# Altium PCB DT_AZP1524B1_PCB1_00A.PcbDoc (part 1 of 3)
Units mm, origin at the board's own origin, x right, y up, seen from the top; angles counter-clockwise.
Board outline 60 x 60.2 mm, 2 copper layers (Top Layer, Bottom Layer), stack 1.57 mm thick; 56 components, 46 nets, 205 pads, 364 vias.
Unrouted connection lines stored in the file: 9.
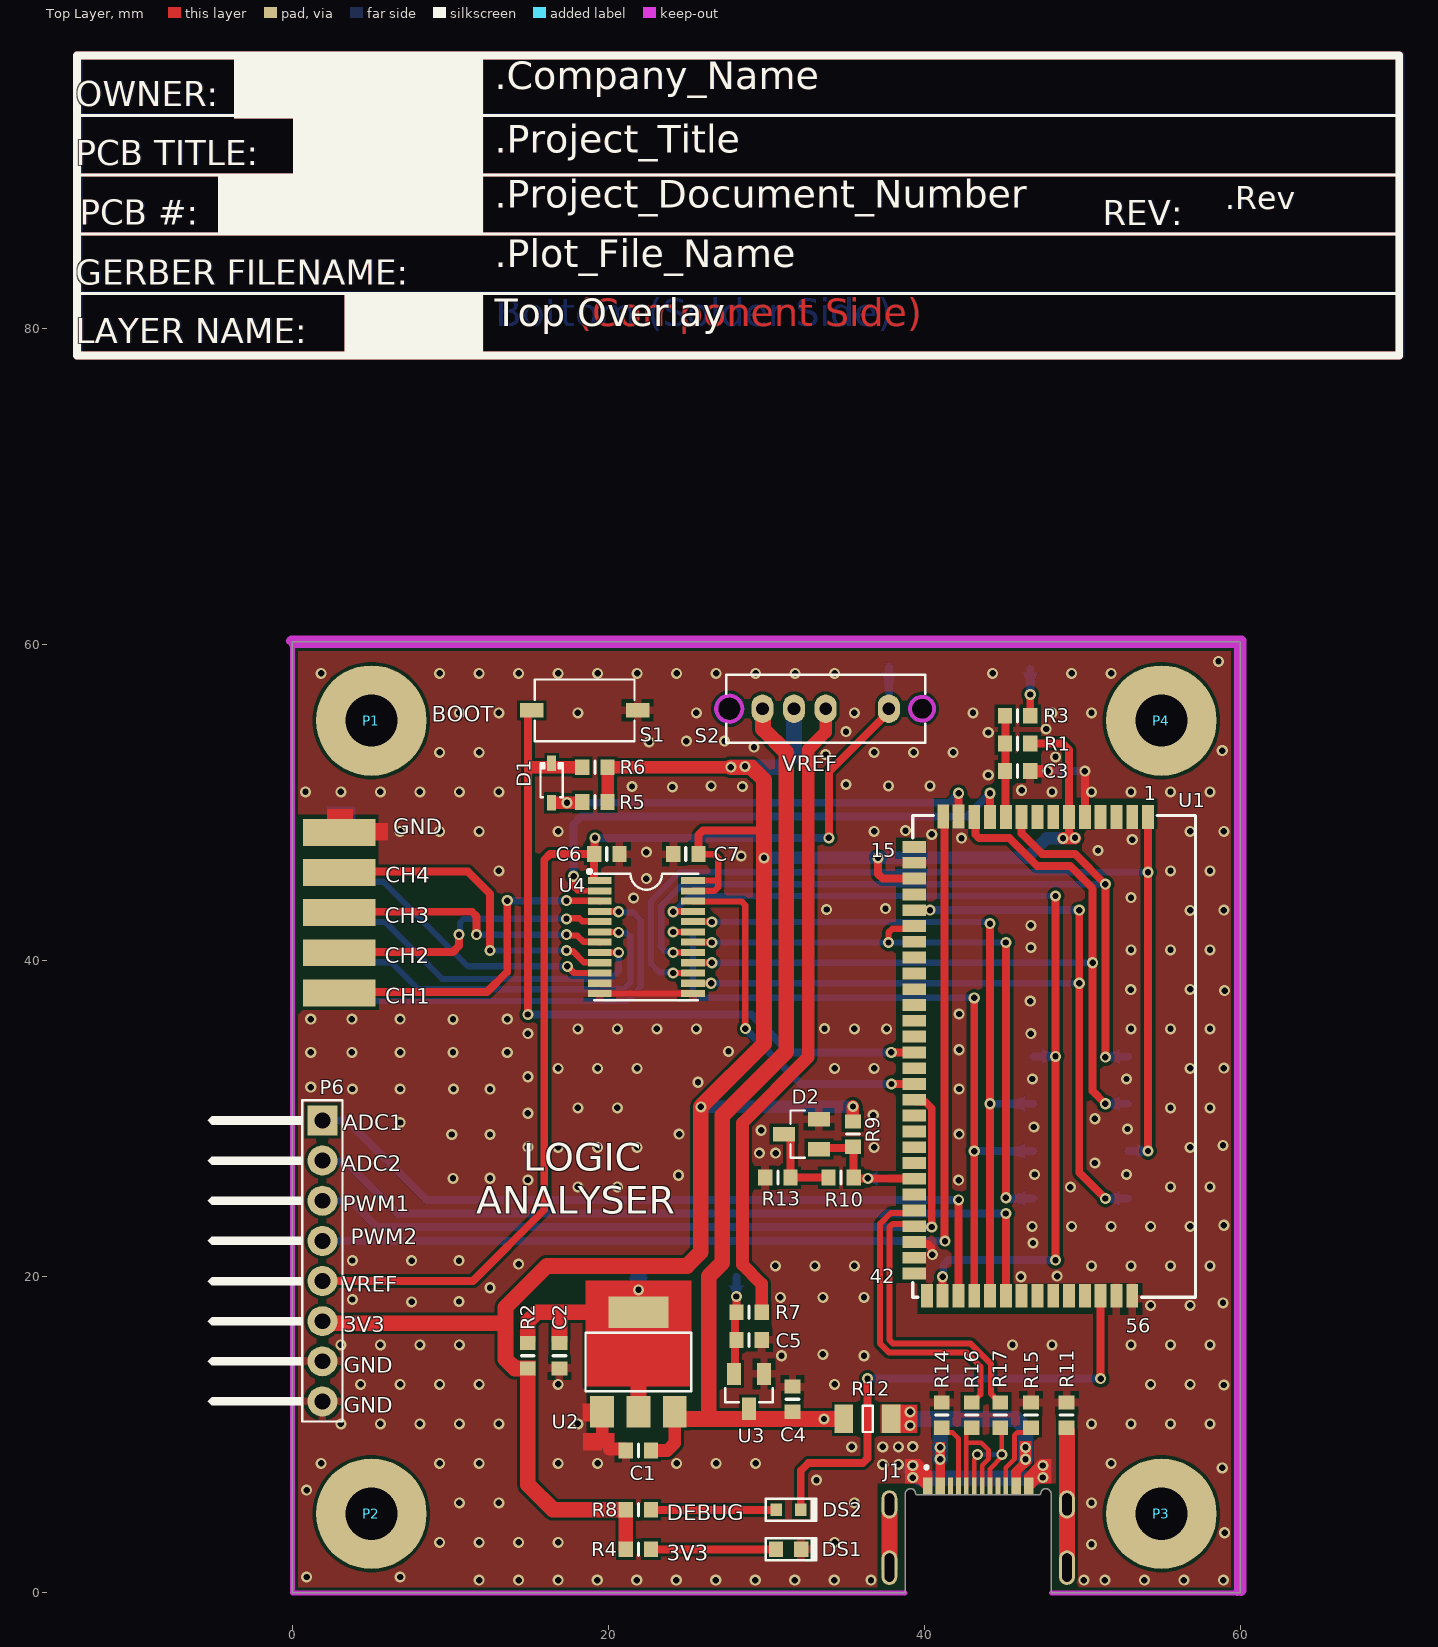
[diagram p0: Top Layer view]
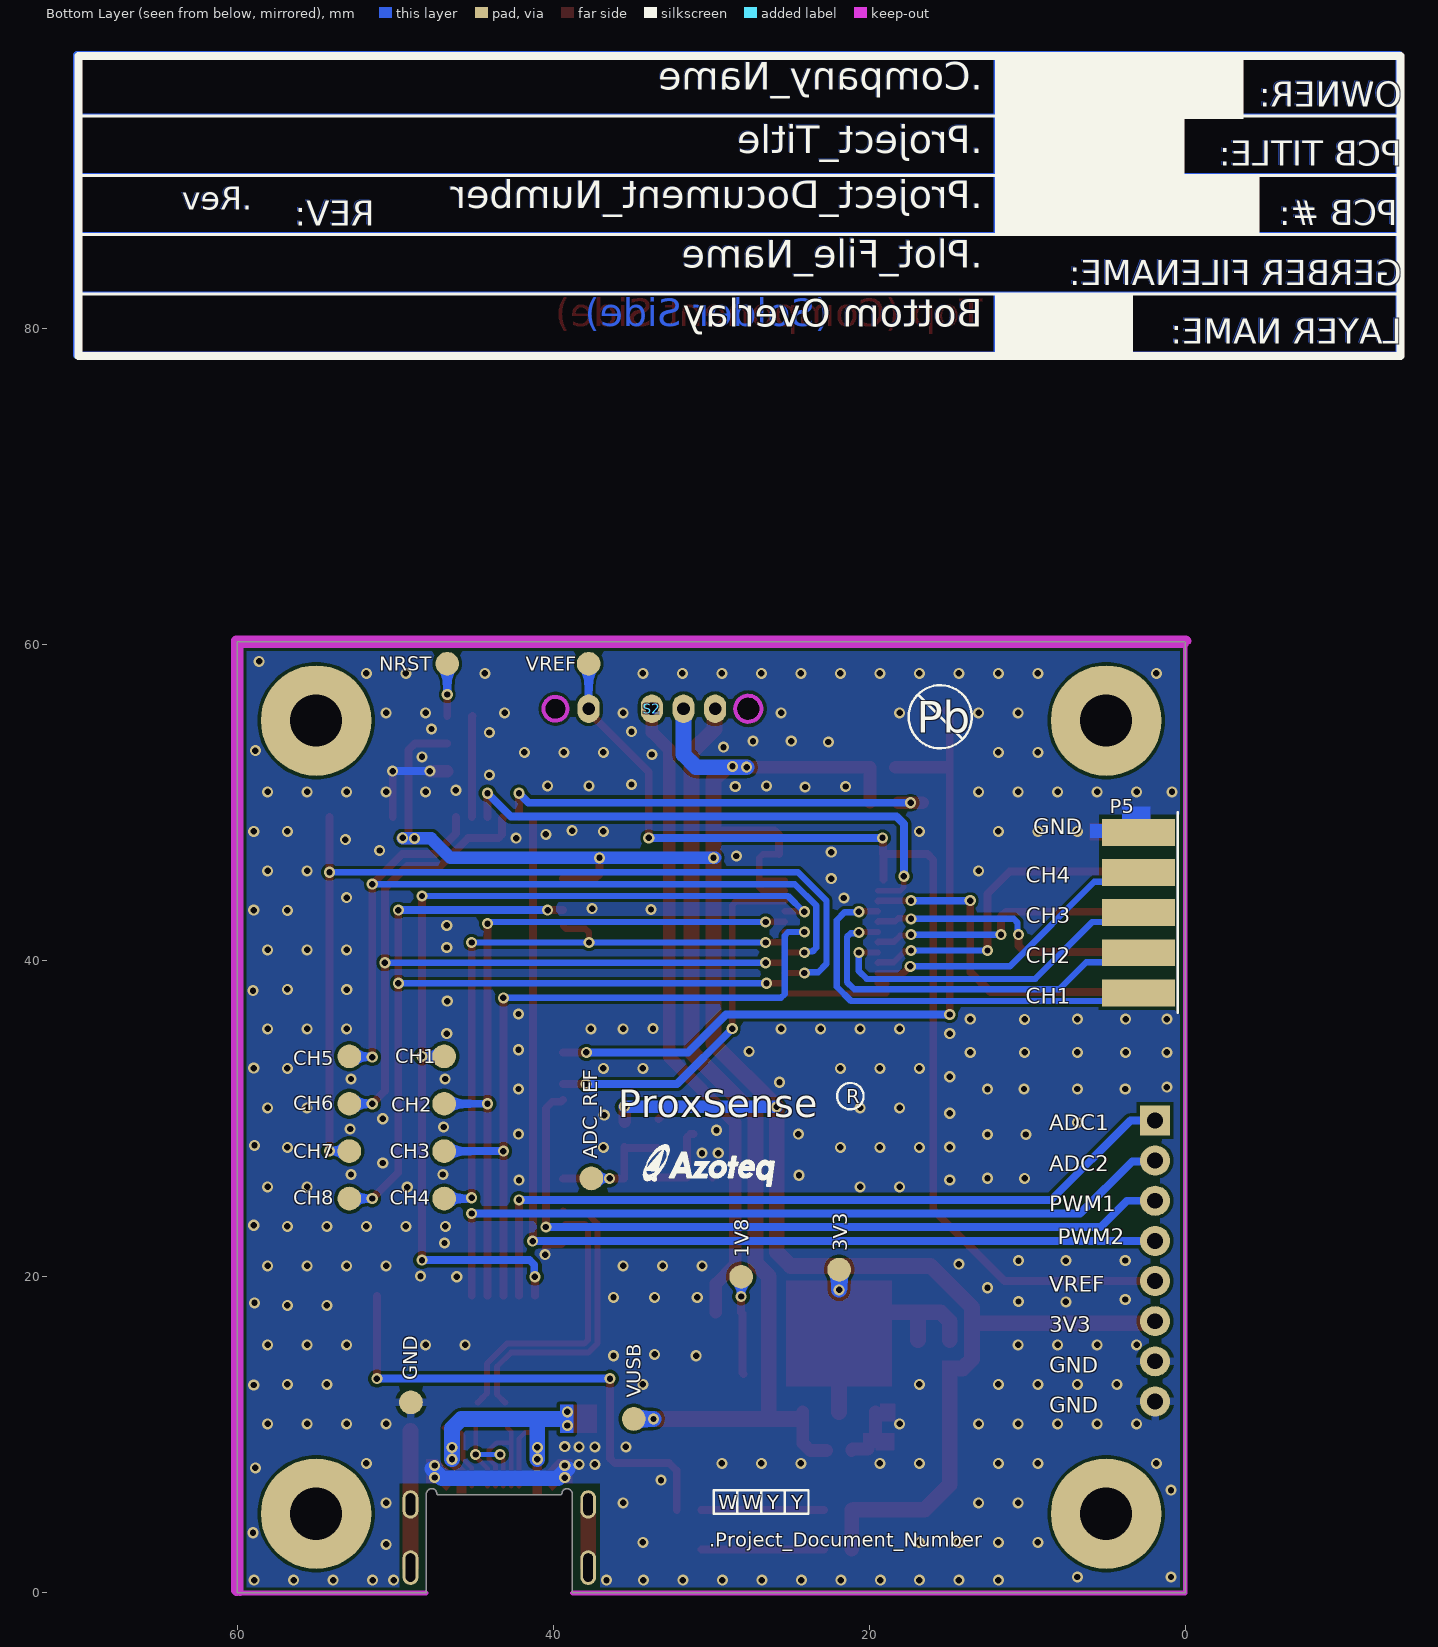
[diagram p1: Bottom Layer view, seen from below]
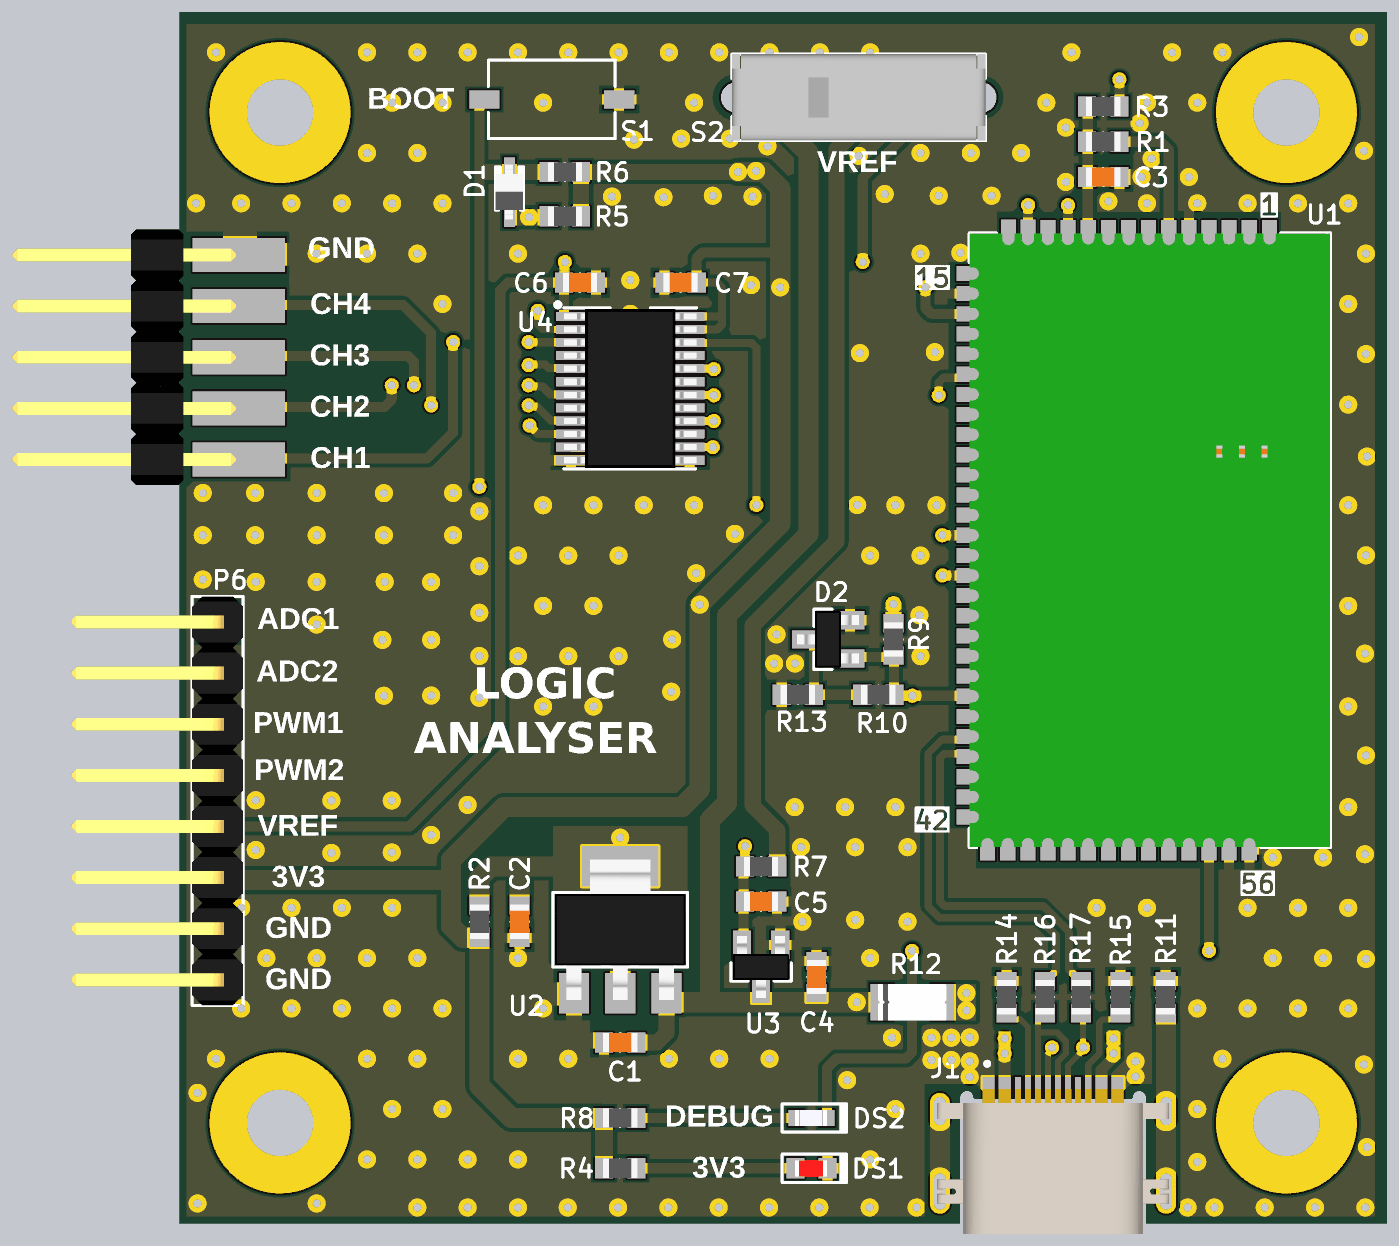
[diagram p3: 3D render of the assembled board from above, using the file's embedded part models]

## Layer stack, top to bottom
Top Solder: solder mask 0.02, Solder Resist, Dk 3.5
Top Layer: signal copper 0.035
Dielectric1: core 1.5, FR-4, Dk 4.8
Bottom Layer: signal copper 0.035
Bottom Solder: solder mask 0.02, Solder Resist, Dk 3.5

## Board outline
0,0 0,60.2 60,60.2 60,0 48.024,0 48.024,6.191 48.024,6.19 ccw(c47.661,6.229) 47.7,6.591 47.698,6.591 ccw(c47.677,6.289) 47.374,6.31 47.374,6.312 cw(c47.239,6.326) 47.225,6.191 47.224,6.191 39.584,6.191 39.583,6.191 cw(c39.569,6.326) 39.434,6.312 39.434,6.31 ccw(c39.131,6.289) 39.11,6.591 39.108,6.591 ccw(c39.147,6.229) 38.784,6.19 38.784,6.191 38.784,0

## Design rules (kind name [scope] priority, off if disabled: settings)
Clearance "V-Score Clearance" [(ObjectKind = 'Track') And (Layer = 'KeepOutLayer') And (Width = AsMM(0.01))] p1: gap=0.5 ignorepadtopadclearanceinfootprint=FALSE except(0: Arc-Hole Track-Hole SMDPad-Hole THPad-Hole Via-Hole Fill-Hole Poly-Hole Region-Hole Text-Hole)
Clearance "Route Clearance" [((ObjectKind = 'Track') or (Objectkind = 'Arc')) And (Layer = 'KeepOutLayer') And (Width = AsMM(0.005))] p2: gap=0.35 ignorepadtopadclearanceinfootprint=FALSE except(0: Arc-Hole Track-Hole SMDPad-Hole THPad-Hole Via-Hole Fill-Hole Poly-Hole Region-Hole Text-Hole)
Clearance "Cu Pour" [Innamedpolygon ('Top-GND') or Innamedpolygon ('Bot-GND')] p3: gap=0.3 ignorepadtopadclearanceinfootprint=FALSE except(0: Arc-Hole Track-Hole SMDPad-Hole THPad-Hole Via-Hole Fill-Hole Poly-Hole Region-Hole Text-Hole)
Clearance "Testpoint Spacing" [hasfootprint('TEST-POINT-1.5MM') vs hasfootprint('TEST-POINT-1.5MM')] p4: gap=0.8 ignorepadtopadclearanceinfootprint=FALSE except(0: Arc-Hole Track-Hole SMDPad-Hole THPad-Hole Via-Hole Fill-Hole Poly-Hole Region-Hole Text-Hole)
Clearance Clearance_General [All] p5: gap=0.2 ignorepadtopadclearanceinfootprint=FALSE except(0: Arc-Hole Track-Hole SMDPad-Hole THPad-Hole Via-Hole Fill-Hole Poly-Hole Region-Hole Text-Hole)
Clearance Via-SMD-Clearance [isvia vs onsoldermask] p6: gap=0.1 ignorepadtopadclearanceinfootprint=FALSE except(0: Arc-Hole Track-Hole SMDPad-Hole THPad-Hole Via-Hole Fill-Hole Poly-Hole Region-Hole Text-Hole)
ComponentClearance [All] p1: gap=0.5 collisioncheckmode=3 verticalgap=0.5 showdistances=FALSE
DiffPairsRouting [All] p1: maxlimit=0.15 minlimit=0.15 mostfreqgap=0.15 toplayer_minwidth=0.381 toplayer_maxwidth=0.381 toplayer_prefwidth=0.381 bottomlayer_minwidth=0.381 bottomlayer_maxwidth=0.381 bottomlayer_prefwidth=0.381 maxuncoupledlength=12.7
FabricationTestPointUsage TestPointUsage [All] p1 off: valid=0 allowmultiple=FALSE
FabricationTestpoint Testpoint [All] p1 off: side=3 testpointundercomponent=TRUE minsize=1.016 maxsize=2.54 preferedsize=1.524 minholesize=0 maxholesize=1.016 preferedholesize=0.813 testpointgrid=0.025 allowsidetop=TRUE allowsidebottom=TRUE usegrid=TRUE gridtolerance=0
FanoutControl Fanout_BGA [IsBGA] p1 off: bgadir=Out bgaviamode=Centered fanoutstyle=Auto fanoutdirection=Alternating viagrid=0.025 // Fanout_BGA (Default Rule)
FanoutControl Fanout_LCC [IsLCC] p2 off: bgadir=Out bgaviamode=Centered fanoutstyle=Auto fanoutdirection=Alternating viagrid=0.025 // Fanout_LCC (Default Rule)
FanoutControl Fanout_SOIC [IsSOIC] p3 off: bgadir=Out bgaviamode=Centered fanoutstyle=Auto fanoutdirection=Alternating viagrid=0.025 // Fanout_SOIC (Default Rule)
FanoutControl Fanout_Small [(CompPinCount < 5)] p4 off: bgadir=Out bgaviamode=Centered fanoutstyle=Auto fanoutdirection=OutThenIn viagrid=0.025 // Fanout_Small (Default Rule)
FanoutControl Fanout_Default [All] p5 off: bgadir=Out bgaviamode=Centered fanoutstyle=Auto fanoutdirection=Alternating viagrid=0.025 // Fanout_Default (Default Rule)
HoleSize [All] p1 off: absolutevalues=TRUE maxlimit=4 minlimit=0.3 maxpercent=80.000 minpercent=20.000
HoleToHoleClearance [All] p1: gap=0.3 allowstackedmicrovias=TRUE
LayerPairs [All] p1 off: enforce=TRUE
MinimumSolderMaskSliver [All] p1: minsoldermaskwidth=0.2
PlaneClearance [All] p1 off: clearance=0.3
PlaneConnect PlaneConnect_Pads [Ispad] p1 off: planeconnectstyle=Relief reliefexpansion=0.5 reliefentries=4 reliefconductorwidth=0.35 reliefairgap=0.25
PlaneConnect PlaneConnect_Vias [Isvia] p2 off: planeconnectstyle=Direct reliefexpansion=0.508 reliefentries=4 reliefconductorwidth=0.254 reliefairgap=0.254
PolygonConnect PolygonConnectVia [IsVia] p1: connectstyle=Direct reliefconductorwidth=0.254 reliefentries=4 polygonreliefangle="90 Angle" airgapwidth=0.254
PolygonConnect [All] p2: connectstyle=Relief reliefconductorwidth=0.5 reliefentries=4 polygonreliefangle="90 Angle" airgapwidth=0.254
RoutingCorners [All] p1: cornerstyle=45-Degree minsetback=2.5 maxsetback=2.5
RoutingPriority [All] p1 off: routingpriority=0
RoutingTopology [All] p1 off: topology=Shortest
RoutingVias "Pwr Vias" [Isvia] p1: holewidth=0.4 width=0.8 viastyle="Through Hole" minholewidth=0.2 minwidth=0.5 maxholewidth=2 maxwidth=5
RoutingVias RoutingVias_General [All] p2: holewidth=0.4 width=0.8 viastyle="Through Hole" minholewidth=0.3 minwidth=0.65 maxholewidth=0.5 maxwidth=0.9
SilkToSilkClearance [All] p1: silktosilkclearance=0.15
SilkToSolderMaskClearance SilkscreenOverComponentPads [isdesignator vs onsoldermask] p1: minsilkscreentomaskgap=0.1 clearancetoexposedcopper=TRUE
SolderMaskExpansion "Via Soldermask" [isvia] p1: expansion=-1 istentingtop=FALSE
SolderMaskExpansion [All] p2: expansion=0.1 istentingtop=FALSE
SupplyNets "Schematic Supply Nets_7" [InNet('3V3')] p1: voltage=0.000
SupplyNets "Schematic Supply Nets_6" [InNet('1V8')] p2: voltage=0.000
SupplyNets "Schematic Supply Nets_4" [InNet('V_USB')] p3: voltage=0.000
SupplyNets "Schematic Supply Nets_3" [InNet('Vref')] p4: voltage=0.000
SupplyNets "Schematic Supply Nets_2" [InNet('V_BUS')] p5: voltage=0.000
SupplyNets "Schematic Supply Nets_1" [InNet('GND')] p6: voltage=0.000
SupplyNets "Schematic Supply Nets" [InNet('CASE_GND')] p7: voltage=0.000
ViasUnderSMD [All] p1: allowed=FALSE
Width Width_diff [InDifferentialPair('RS485')] p1: maxlimit=0.2 minlimit=0.2 preferedwidth=0.2 minimp=50.000000 maximp=50.000000 favimp=50.000000
Width Width_Power [InNetClass('POWER')] p2 off: maxlimit=1 minlimit=0.25 preferedwidth=0.5
Width Width_General [All] p3: maxlimit=5 minlimit=0.2 preferedwidth=0.2
10 further rules are at their usual default settings.

## Classes and differential pairs
component class DT_AZP1524A1_SCH1[SHEET1]_00A: PCB1

## Components (designator, comment, footprint, x,y, rotation, side; value= is the part's Value field where it differs from the comment)
1V8 "" TEST-POINT-1.5MM 28.1,20 r90 bottom
3V3 "" TEST-POINT-1.5MM 21.9,20.45 r180 bottom
ADC_REF "" TEST-POINT-1.5MM 37.581,26.225 r90 bottom
C1 "1uF" C-0603 21.9,9 r0 top
C2 "10uF" C-0603 16.9,15 r90 top
C3 "100nF" C-0603 45.9,52 r180 top
C4 "1uF" C-0603 31.65,12.25 r270 top
C5 "10uF" C-0603 28.9,16 r180 top
C6 "1uF" C-0603 19.9,46.75 r0 top
C7 "1uF" C-0603 24.9,46.75 r0 top
CH1 "" TEST-POINT-1.5MM 46.9,33.95 r180 bottom locked
CH2 "" TEST-POINT-1.5MM 46.9,30.95 r180 bottom
CH3 "" TEST-POINT-1.5MM 46.9,27.95 r180 bottom
CH4 "" TEST-POINT-1.5MM 46.9,24.95 r180 bottom locked
CH5 "" TEST-POINT-1.5MM 52.9,33.95 r180 bottom locked
CH6 "" TEST-POINT-1.5MM 52.9,30.95 r180 bottom locked
CH7 "" TEST-POINT-1.5MM 52.9,27.95 r180 bottom
CH8 "" TEST-POINT-1.5MM 52.9,24.95 r180 bottom
D1 "NSR0320MW2T1G" D-SOD-323 16.4,51.25 r270 top
D2 "LM4041DID" SOT-23 32.225,29.025 r180 top
DS1 "KPT-1608ID" D-LED-RED-0603 31.4,2.75 r180 top
DS2 "WEJT61BC-D76" "D-LED-BLUE-0603 - WEJ updated" 31.4,5.25 r180 top
GND "" TEST-POINT-1.5MM 49,12.05 r180 bottom
J1 "USB4500-03-0-A" J-USB-GCT-USB4500-03-0-A 43.15,3.75 r0 top locked
NRST "" TEST-POINT-1.5MM 46.7,58.8 r90 bottom
P1 "ELx7.0y7.0_D3.3" MPAD-X7.0Y7.0_D3.3 5,55.2 r0 top locked
P2 "ELx7.0y7.0_D3.3" MPAD-X7.0Y7.0_D3.3 5,5.001 r0 top locked
P3 "ELx7.0y7.0_D3.3" MPAD-X7.0Y7.0_D3.3 55,5 r0 top locked
P4 "ELx7.0y7.0_D3.3" MPAD-X7.0Y7.0_D3.3 55,55.2 r0 top locked
P5 "HEADER-10W" P-BERG-10W-HDR-EDGE 2.957,43.043 r180 bottom
P6 "8W-SIL-RA" P-BERG-8W-HDR-RA-SIL 1.9,21 r270 top
R1 "" R-0603 45.9,53.75 r0 top
R2 "DNP" R-0603 14.9,15 r270 top
R3 "" R-0603 45.9,55.5 r180 top
R4 "470R" R-0603 21.9,2.75 r180 top
R5 "" R-0603 19.15,50.05 r180 top
R6 "" R-0603 19.15,52.25 r180 top
R7 "DNP" R-0603 28.9,17.75 r0 top
R8 "" R-0603 21.9,5.25 r180 top
R9 "DNP" R-0603 35.475,29.025 r90 top
R10 "DNP" R-0603 34.725,26.275 r0 top
R11 "0R" R-0603 49,11.25 r90 top
R12 "0.5A POLYSWITCH" R-POLYSWITCH-1206 36.4,11 r0 top
R13 "DNP" R-0603 30.725,26.275 r0 top
R14 "5K1" R-0603 41.1,11.25 r90 top
R15 "5K1" R-0603 46.75,11.25 r90 top
R16 "22R" R-0603 43,11.25 r270 top
R17 "22R" R-0603 44.8,11.25 r90 top
S1 "GABOU-KFC-807" S-GABOU-KFC-807 18.5,55.85 r180 top value=KFC-807
S2 "OS103011MS8QP1" S-C&K-OS103011MS8QP1 33.75,55.95 r180 bottom locked
U1 "AZP1159C1" AZP1159C1 48.214,33.95 r270 top locked
U2 "AMS1117-3.3V" SOT-223 21.9,14.6 r0 top
U3 "AP2138N-1.8TRG1" SOT-23 28.9,12.75 r270 top
U4 "SN74LVC8T245PW" U-TSSOP-24 22.4,41.5 r0 top
VREF "" TEST-POINT-1.5MM 37.75,58.8 r180 bottom
VUSB "" TEST-POINT-1.5MM 34.9,11 r90 bottom

## Footprints (in the part's own frame and the unit in brackets; to place one, negate y for a bottom-side part, rotate by r counter-clockwise, add the part's x,y. Pads: shape width x height; smd on the part's side, far side on the other; paste and mask are expansions set on the pad)
AZP1159C1 [mm] "AZP1159B1,56-Leads, Body 30.5x 17.9mm (max), Pitch xxmm, IPC Medium Density"
  rect 1.5x0.75 smd: 1(-15.15,5.94) 2(-15.15,4.94) 3(-15.15,3.94) 4(-15.15,2.94) 5(-15.15,1.94) 6(-15.15,0.94) 7(-15.15,-0.06) 8(-15.15,-1.06) 9(-15.15,-2.06) 10(-15.15,-3.06) 11(-15.15,-4.06) 12(-15.15,-5.06) 13(-15.175,-6.05) 14(-15.175,-7.025) 43(15.15,-8.06) 44(15.15,-7.06) 45(15.15,-6.06) 46(15.15,-5.06) 47(15.15,-4.06) 48(15.15,-3.06) 49(15.15,-2.06) 50(15.15,-1.06) 51(15.15,-0.06) 52(15.15,0.94) 53(15.15,1.94) 54(15.15,2.94) 55(15.15,3.94) 56(15.15,4.94)
  rect 0.75x1.5 smd: 15(-13.25,-8.85) 16(-12.25,-8.85) 17(-11.25,-8.85) 18(-10.25,-8.85) 19(-9.25,-8.85) 20(-8.25,-8.85) 21(-7.25,-8.85) 22(-6.25,-8.85) 23(-5.25,-8.85) 24(-4.25,-8.85) 25(-3.25,-8.85) 26(-2.25,-8.85) 27(-1.25,-8.85) 28(-0.25,-8.85) 29(0.75,-8.85) 30(1.75,-8.85) 31(2.75,-8.85) 32(3.75,-8.85) 33(4.75,-8.85) 34(5.75,-8.85) 35(6.75,-8.85) 36(7.75,-8.85) 37(8.75,-8.85) 38(9.75,-8.85) 39(10.75,-8.85) 40(11.75,-8.85) 41(12.75,-8.85) 42(13.75,-8.85)
  silkscreen extent -15.25,-8.95 15.25,8.95, body extent -15.25,-8.95 15.25,8.95, height 1.85
C-0603 [mm] "Chip Capacitor, 2-Leads, Body 1.6x0.8mm, IPC Medium Density"
  rect 0.9x1 smd: 1(-0.8,0) 2(0.8,0)
  silkscreen extent 0,-0.4 0,0.4, body extent -0.85,-0.48 0.85,0.48, height 0.95
"D-LED-BLUE-0603 - WEJ updated" [mm] "Chip LED, 2-Leads, Body 1.6x0.8mm, IPC Medium Density"
  rect 0.75x0.8 smd: 1(-0.775,0) 2(0.775,0)
  silkscreen extent -1.75,-0.7 1.45,0.7, body extent -0.78,-0.39 0.82,0.41, height 0.75
D-LED-RED-0603 [mm] "Chip LED, 2-Leads, Body 1.6x0.8mm, IPC Medium Density"
  rect 0.9x1 smd: 1(-0.8,0) 2(0.8,0)
  silkscreen extent -1.75,-0.7 1.45,0.7, body extent -0.78,-0.39 0.82,0.41, height 0.75
D-SOD-323 [mm] "Molded Diode, 2-Leads, Body 1.6x1.2mm, IPC Medium Density"
  rect 0.95x0.55 smd: 1(-1.25,0) 2(1.25,0)
  silkscreen extent -1.25,-0.7 0.9,0.7, body extent -1.36,-0.7 1.36,0.67, height 1.2
J-USB-GCT-USB4500-03-0-A [mm] "GCT-TYPE-C-USB4500-03-0-A, 16-Leads, Body 8.94mm x 6.5mm(max), Pitch 3.0mm, IPC Medium Density"
  rect 0.6x1.1 smd: A1_B12(-2.946,2.991) A4_B9(-2.146,2.991) B1_A12(3.454,2.991) B4_A9(2.654,2.991)
  rect 0.3x1.1 smd: A5(-0.996,2.991) A6(0.004,2.991) A7(0.504,2.991) A8(1.504,2.991) B5(2.004,2.991) B6(1.004,2.991) B7(-0.496,2.991) B8(-1.496,2.991)
  oval 1x2.2 hole 0.6 slot 1.8 at 90 deg: S1(-5.366,-2.159) S4(5.874,-2.159)
  oval 1x1.8 hole 0.6 slot 1.4 at 90 deg: S2(5.874,1.841) S3(-5.366,1.841)
  silkscreen extent -3.12,4.09 -2.92,4.29, body extent -5.52,-4.26 6.02,2.94, height 2.36
MPAD-X7.0Y7.0_D3.3 [mm] "THP Pad,1-Lead, Body 7.0mm x 7.0mm (max), Drill 3.3mm, IPC Medium Density"
  round 7 hole 3.3: 1(0,0)
P-BERG-8W-HDR-RA-SIL [mm] "SIL,Horizontal,8-Leads, Body 20.32x8.54mm (max), Pitch 2.54mm, IPC Medium Density"
  rect 1.9x1.9 hole 1: 1(-8.89,0)
  round 1.9 hole 1: 2(-6.35,0) 3(-3.81,0) 4(-1.27,0) 5(1.27,0) 6(3.81,0) 7(6.35,0) 8(8.89,0)
  silkscreen extent -10.16,-7.26 10.16,1.27, body extent -10.16,-7.27 10.16,1.27, height 5.16
P-BERG-10W-HDR-EDGE [mm] "Pin Header,Horizontal,10-Leads, Body 12.7x5.08mm (max), Pitch 2.54mm, IPC Medium Density"
  rect 4.6x1.7 smd: 1(0,5.08) 3(0,2.54) 5(0,0) 7(0,-2.54) 9(0,-5.08)
  rect 4.6x1.7 smd far side: 2(0,5.08) 4(0,2.54) 6(0,0) 8(0,-2.54) 10(0,-5.08)
  silkscreen extent 2.5,-6.35 2.5,6.35, body extent 0.15,-6.35 11.25,6.35, height 1.57
R-0603 [mm] "Chip Resistor, 2-Leads, Body 1.6x0.8mm, IPC Medium Density"
  rect 0.9x1 smd: 1(-0.8,0) 2(0.8,0)
  silkscreen extent 0,-0.4 0,0.4, body extent -0.85,-0.47 0.85,0.48, height 0.6
R-POLYSWITCH-1206 [mm] "Chip PTC Resistor, 2-Leads, Body 3.4x1.8mm, IPC Medium Density"
  rect 1.15x1.8 smd: 1(-1.5,0) 2(1.5,0)
  silkscreen extent -0.31,-0.82 0.33,0.83, body extent -1.7,-0.9 1.7,0.9, height 0.64
S-C&K-OS103011MS8QP1 [mm] "OS103011MS8QP1,4-Leads, Body 12.6 x 4.3 mm (max),IPC Medium Density"
  oval 1.4x1.8 hole 0.8: 1(-4,0) 2(0,0) 3(2,0) 4(4,0)
  round 1.5 hole 1.5 unplated: HM(-6.1,0) HM(6.1,0)
  body extent -6.3,-2.15 6.3,2.15, height 8.4
S-GABOU-KFC-807 [mm] "GABOU KFC-807, 2-Leads, Body 8 x 3.9 mm (max), Pitch 7.45 mm, IPC Medium Density"
  rect 1.5x0.9 smd: 1(-3.35,0) 2(3.35,0)
  silkscreen extent -3.15,-1.95 3.15,1.95
SOT-23 [mm] "SOT23, 3-Leads, Body 3.0x2.5mm (max), Pitch 0.95mm, IPC Medium Density"
  rect 1.4x0.9 smd: 1(-1.1,0.95) 2(-1.1,-0.95) 3(1.1,0)
  silkscreen extent -0.2,-1.5 0.7,1.5, body extent -1.54,-1.4 1.54,1.39, height 1.4
SOT-223 [mm] "SOT223, 3-Leads, Body 7.3x6.7mm (max), Pitch 2.3mm, IPC Medium Density"
  rect 1.5x2 smd: 1(-2.3,-3.15) 2(0,-3.15) 3(2.3,-3.15)
  rect 3.8x2 smd: 2(0,3.15)
  silkscreen extent -3.35,-1.85 3.35,1.85, body extent -3.25,-3.48 3.25,3.48, height 1.65
TEST-POINT-1.5MM [mm] "SMD Test point,1-Leads, Body 1.5x1.5mm (max), IPC Medium Density"
  round 1.5 smd paste-2: 1(0,0)
  body extent -0.75,-0.75 0.75,0.75, height 0.02
U-TSSOP-24 [mm] "TSSOP, 24-Leads, Body 7.9x4.5mm (max), Pitch 0.65mm, IPC Medium Density"
  rect 1.5x0.45 smd: 1(-2.95,3.575) 2(-2.95,2.925) 3(-2.95,2.275) 4(-2.95,1.625) 5(-2.95,0.975) 6(-2.95,0.325) 7(-2.95,-0.325) 8(-2.95,-0.975) 9(-2.95,-1.625) 10(-2.95,-2.275) 11(-2.95,-2.925) 12(-2.95,-3.575) 13(2.95,-3.575) 14(2.95,-2.925) 15(2.95,-2.275) 16(2.95,-1.625) 17(2.95,-0.975) 18(2.95,-0.325) 19(2.95,0.325) 20(2.95,0.975) 21(2.95,1.625) 22(2.95,2.275) 23(2.95,2.925) 24(2.95,3.575)
  silkscreen extent -3.7,-4 3.3,4.25, body extent -3.3,-3.95 3.3,3.95, height 1.1

## Part data
1V8 3V3 ADC_REF CH1 CH2 CH3 CH4 CH5 CH6 CH7 CH8 GND NRST VREF VUSB: library part TEST-POINT-SMD-1.5MM, ComponentLink1Description="Footprint Detail", ComponentLink2Description="Application Note", ComponentLink3Description="Layout Guidelines", Generated_By=GHM
C1 C4 C6 C7: library part "CAP 1u0F 0603 CER X5R 10% 10V", "Capacitor, Ceramic, 1uF, 0603, X5R, 10%, 10V", Manufacturer=Samsung, Manufacturer_PN=CL10A105KP8NNNC, Tolerance=10%, Voltage=10V, 3D Model=YES, Checked_By="Jason Reinecke", ComponentLink1Description="Footprint Detail", ComponentLink2Description="Application Note", ComponentLink3Description="Layout Guidelines", Dept.=LightSense, Generated_By=JR, Generated_Date=2023-04-06, HelpURL=\\azoteq-files1\PCBCAD\Datasheets\Capacitors\Samsung\CL10A105KP8NNNC_Spec.pdf, Int_Note="Created for Marike Swart", Int_Part_Number=CAP0021, Local_Supplier=Mouser, Local_Supplier_PN=187-CL10A105KP8NNNC, Offshore_Supplier=Digikey, Offshore_Supplier_PN=1276-1182-2-ND, Pin_Count=2, Supplier=Azoteq, Type=SMT
C2 C5: library part "CAP 10uF 0603 CER X5R 20% 6V3 SAMSUNG", "Capacitor, Ceramic, 10uF, 0603, X5R, 20%, 6V3 SAMSUNG", Manufacturer=SAMSUNG, Manufacturer_PN=CL10A106MQ8NNNC, Tolerance=20%, Voltage=6V3, 3D Model=YES, Checked_By="Jason Reinecke", ComponentLink1Description="Footprint Detail", ComponentLink2Description="Application Note", ComponentLink3Description="Layout Guidelines", Dept.=LightSense, Generated_By=JR, Generated_Date=2023-04-05, HelpURL="\\Azoteq-files1\pcbcad\Datasheets\Capacitors\TDK Ceramic Mid Voltage.pdf", Int_Note="Created for Marike Swart", Int_Part_Number=CAP0076, Local_Supplier=Mouser, Local_Supplier_PN=187-CL10A106MQ8NNNC, Offshore_Supplier=Digikey, Offshore_Supplier_PN=1276-1119-2-ND, Pin_Count=2, Supplier=Azoteq, Type=SMT
C3: library part "CAP 100nF 0603 CER X7R 10% 50V", "Capacitor, Ceramic, 100nF, 0603, X7R, 10%, 50V", Manufacturer=Samsung, Manufacturer_PN=CL10B104KB8NNNC, Tolerance=10%, Voltage=50V, 3D Model=YES, Checked_By="Jason Reinecke", ComponentLink1Description="Footprint Detail", ComponentLink2Description="Application Note", ComponentLink3Description="Layout Guidelines", Dept.=LightSense, Generated_By=JR, Generated_Date=2023-04-20, HelpURL="\\Azoteq-files1\pcbcad\Datasheets\Capacitors\Samsung Ceramic.pdf", Int_Note="Created for Marike Swart", Int_Part_Number=CAP0032, Local_Supplier=Mouser, Local_Supplier_PN=187-CL10B104KB8NNNC, Offshore_Supplier=Digikey, Offshore_Supplier_PN=1276-1000-2-ND, Pin_Count=2, Supplier=Azoteq, Type=SMT
D1: library part "Diode Schottky 20V 1A SOD-323", "Diode Schottky 20V 1A 2-Pin SOD-323 T/R", Manufacturer=ONsemiconductors, Voltage=20V, ComponentLink1Description="Footprint Detail", ComponentLink2Description="Application Note", ComponentLink3Description="Layout Guidelines", Generated_By=JR, Generated_Date=2017-09-11, Int_Part_Number=DIO0074, Manufacturer_PN=NSR0320MW2T1G, MSL=1, Pin_Count=2, Supplier=Azoteq, Type=SMT, Wattage=1A
D2: library part DIODE-ZENER-LM4041-SOT-23, Manufacturer="Texas Instruments", Manufacturer_PN=LM4041DIDBZTG4, ComponentLink1Description="Footprint Detail", ComponentLink2Description="Application Note", ComponentLink3Description="Layout Guidelines", Generated_By=GHM, Generated_Date=2012-03-13, HelpURL="\\Azoteq-files1\pcbcad\Datasheets\Voltage References\Texas Instruments\LM4041DIDBZTG4.pdf", Local_Supplier="RS Components", Local_Supplier_PN=661-9405, Pin_Count=3, Supplier=Azoteq, Type=SMT
DS1: library part LED-KPT1608ID-RED-0603, Manufacturer=KingBright, ComponentLink1Description="Footprint Detail", ComponentLink2Description="Application Note", ComponentLink3Description="Layout Guidelines", Generated_By=GHM, HelpURL=\\Azoteq-files1\pcbcad\Datasheets\LEDs\KingBright\KPT-1608.pdf, Local_Supplier=Communica, Local_Supplier_PN=KPT-1608ID, Manufacturer_PN=KPT-1608ID, Pin_Count=2, Supplier=Azoteq, Type=SMT
DS2: library part LED-WEJT61BC-D76-BLUE-0603, "LED, WEJT61BC-D76, Blue, Vf=3.2V , If=30mA", Manufacturer=WEJ, ComponentLink1Description="Footprint Detail", ComponentLink2Description="Application Note", ComponentLink3Description="Layout Guidelines", Generated_By=JR, Generated_Date=2016-12-02, HelpURL="\\Azoteq-files1\pcbcad\Datasheets\LEDs\WEJT61BC-D76-updated 02-12-2016.pdf", Int_Part_Number=LED0098, Manufacturer_PN=WEJT61BC-D76, Pin_Count=2, Supplier=Azoteq, Type=SMT
J1: library part USB-GCT-USB4500-03-0-A, "USB-C TYPE REC 16P, 3U\" MID MNT 0.8MM USB2.0", Manufacturer=GCT, Tolerance=na, Voltage=20V, 3D Model=YES, Checked_By="Jason Reinecke", ComponentLink1Description="Footprint Detail", ComponentLink2Description="Application Note", ComponentLink3Description="Layout Guidelines", Dept.=ProxSense, Generated_By=JR, Generated_Date=2022-02-24, HelpURL=\\azoteq-files1\PCBCAD\Datasheets\USB\GCT\usb4500.pdf, Int_Note="Created for Ferdinand Stegmann", Int_Part_Number=NONE, Local_Supplier=Mouser, Local_Supplier_PN=640-USB4500030A, Manufacturer_PN=USB4500-03-0-A, Offshore_Supplier=Digikey, Offshore_Supplier_PN=2073-USB4500-03-0-ATR-ND, Pin_Count=16, Supplier=Azoteq, Type=SMT, Wattage=5A
P1 P2 P3 P4: library part MPAD-ELx7.0y7.0_D3.3, ComponentLink1Description="Footprint Detail", ComponentLink2Description="Application Note", ComponentLink3Description="Layout Guidelines", Generated_By=GHM, Generated_Date=2013-08-27
P5: library part BERG-10W-HDR-EDGE, "Connector, Header, Edge Mount,DIL, 10W, SMT", ComponentLink1Description="Footprint Detail", ComponentLink2Description="Application Note", ComponentLink3Description="Layout Guidelines", Generated_By=GHM, Generated_Date=2013-07-29, Local_Supplier=Communica, Pin_Count=10, Supplier=Azoteq, Type=SMT
P6: library part BERG-8W-HDR-RA-SIL, "Connector, Header, Right angle, SIL, 8W, THP", Manufacturer="Ho Chien", ComponentLink1Description="Footprint Detail", ComponentLink2Description="Application Note", ComponentLink3Description="Layout Guidelines", Generated_By=GHM, HelpURL="\\azoteq-files1\pcbcad\Datasheets\Headers\Ho Chien Pin Header 2.54mm.pdf", Local_Supplier=Communica, Local_Supplier_PN=709401, Pin_Count=8, Supplier=Azoteq, Type=THP
R1 R3 R5 R6 R8: library part "MNFR 0603 5% 0.1W", "Resistor, 0603, 5%, 0.1W", Tolerance=5%, 3D Model=YES, Checked_By="Jason Reinecke", ComponentLink1Description="Footprint Detail", ComponentLink2Description="Application Note", ComponentLink3Description="Layout Guidelines", Generated_By=JR, Generated_Date=2017-02-01, Int_Part_Number=MNFR04, Local_Supplier=Mouser, Offshore_Supplier=Digikey, Pin_Count=2, Supplier="Assembly Manufacturer", Type=SMT, Wattage=0.1W
R2 R7 R9 R10 R13: library part "RES DNP 0603", "Resistor, DNP, 0603", 3D Model=YES, Checked_By="Jason Reinecke", ComponentLink1Description="Footprint Detail", ComponentLink2Description="Application Note", ComponentLink3Description="Layout Guidelines", Generated_By=JR, Generated_Date=2010-01-05, Int_Part_Number=DNP, Local_Supplier=Mouser, Offshore_Supplier=Digikey, Pin_Count=2, Supplier=Azoteq, Type=SMT
R4: library part "RES 470R 0603 5% 0.1W Yageo", "Res Thick Film 0603 470 Ohm 5% 0.1W(1/10W) ±100ppm/°C Molded SMD Paper T/R", Manufacturer=Yageo, Manufacturer_PN=RC0603JR-07470RL, Tolerance=5%, 3D Model=YES, Checked_By="Jason Reinecke", ComponentLink1Description="Footprint Detail", ComponentLink2Description="Application Note", ComponentLink3Description="Layout Guidelines", Generated_By=JR, Generated_Date=2017-07-01, Int_Part_Number=RES0307, Local_Supplier=Mouser, Offshore_Supplier=Digikey, Pin_Count=2, Supplier=Azoteq, Type=SMT, Wattage=0.1W
R11: library part "RES 0R 0603 1% 0.1W Yageo", "Res Thick Film 0603 0 Ohm Molded SMD Paper T/R", Manufacturer=Yageo, Manufacturer_PN=RC0603JR--070R, Tolerance=1%, 3D Model=YES, Checked_By="Jason Reinecke", ComponentLink1Description="Footprint Detail", ComponentLink2Description="Application Note", ComponentLink3Description="Layout Guidelines", Generated_By=JR, Generated_Date=2009-10-13, Int_Part_Number=RES0139, Local_Supplier=Mouser, Offshore_Supplier=Digikey, Pin_Count=2, Supplier=Azoteq, Type=SMT, Wattage=0.1W
R12: library part POLYSWITCH-nanoSMDC050F/13.2, "Polyswitch, nanoSMDC050F, 1206, 0.5A, 13.2V", Manufacturer=Tyco, Manufacturer_PN=nanoSMDC050F/13.2, Checked_By="Jason Reinecke", ComponentLink1Description="Footprint Detail", ComponentLink2Description="Application Note", ComponentLink3Description="Layout Guidelines", Generated_By=JR, Generated_Date=2011-02-25, HelpURL="\\Azoteq-files1\pcbcad\Datasheets\PTC\Tyco Electronics\Raychem PolySwitch 2011.pdf", Int_Part_Number=SWT0070, Local_Supplier=Mouser, Local_Supplier_PN=138-679, Offshore_Supplier=Digikey, Pin_Count=2, Supplier=Azoteq, Type=SMT
R14 R15 R16 R17: library part "MNFR 0603 1% 0.1W", "Resistor, 0603, 1%, 0.1W", Tolerance=1%, ComponentLink1Description="Footprint Detail", ComponentLink2Description="Application Note", ComponentLink3Description="Layout Guidelines", Generated_By=JR, Generated_Date=2017-02-01, Int_Part_Number=MNFR03, Pin_Count=2, Supplier="Assembly Manufacturer", Type=SMT, Wattage=0.1W
S1: "SWITCH TACTILE SPST-NO 0.05A 12V", Manufacturer=GABOU, Manufacturer_PN=KFC-807, Voltage=12V, ComponentLink1Description="Footprint Detail", ComponentLink2Description="Application Note", ComponentLink3Description="Layout Guidelines", Generated_By=JR, Generated_Date=201-06-18, HelpURL=http://www.gaboukeji.com/plus/view.php?aid=2679&vv=cn, Int_Note="Created for Dylan Els", Pin_Count=2, Supplier=Azoteq, Type=SMT
S2: library part C&K-OS103011MS8QP1, "SWITCH SLIDE SP3T 100MA 12V", Manufacturer=C&K, 3D_Part=No, ComponentLink1Description="Footprint Detail", ComponentLink2Description="Application Note", ComponentLink3Description="Layout Guidelines", Generated_By=JR, Generated_Date=2018-04-24, HelpURL=\\Azoteq-files1\pcbcad\Datasheets\Switches\C&K\OS103011MS8QP1.pdf, Local_Supplier=Digikey, Local_Supplier_PN=CKN9543-ND, Manufacturer_PN=OS103011MS8QP1, Pin_Count=4, Supplier=Azoteq, Type=SMT
U1: "AZP115C01: RP2350 Stamp (Pi Pico) - stamp breakout", Manufacturer=Azoteq, Tolerance=na, 3D Model=YES, Checked_By="Jason Reinecke", ComponentLink1Description="Footprint Detail", ComponentLink2Description="Application Note", ComponentLink3Description="Layout Guidelines", Dept.=ProxSense, Generated_By=JR, Generated_Date=2025-08-07, Int_Note="Created for", Int_Part_Number=NONE, Local_Supplier=Azoteq, Local_Supplier_PN=AZP1159C1, Manufacturer_PN=AZP1159C1, Offshore_Supplier=Azoteq, Offshore_Supplier_PN=AZP1159C1, Pin_Count=56, Supplier=Azoteq, Type=SMT
U2: library part AMS1117-MSKSEMI-SOT-223, "IC, Voltage Regulator, 3.3V Out, 4.7-18V In, 1A", Manufacturer=MSKSEMI, Voltage=3.3V, 3D Model=YES, Checked_By="Jason Reinecke", ComponentLink1Description="Footprint Detail", ComponentLink2Description="Application Note", ComponentLink3Description="Layout Guidelines", Generated_By=JR, Generated_Date=2024-06-03, HelpURL="\\azoteq-files1\PCBCAD\Datasheets\Voltage Regulators\MSKSEMI\MSKSEMI-AMS1117-3-3V.pdf", Int_Note="Created for Kyle Steyn", Int_Part_Number=NONE, Local_Supplier=Mouser, Local_Supplier_PN=863-LM1117MPX-33NOPB, Manufacturer_PN=AMS1117-3.3V, Offshore_Supplier=Digikey, Offshore_Supplier_PN=4518-AMS1117-3.3TR-ND, Pin_Count=4, Supplier=Azoteq, Type=SMT
U3: library part AP2138N-1.8TRG1-SOT-23, "IC REG LINEAR 1.8V 250MA SOT23-3", Manufacturer="Diodes Incorporated", Voltage=1.8V, 3D Model=YES, Checked_By="Jason Reinecke", ComponentLink1Description="Footprint Detail", ComponentLink2Description="Application Note", ComponentLink3Description="Layout Guidelines", Generated_By=JR, Generated_Date=2026-01-16, HelpURL="\\azoteq-files1\PCBCAD\Datasheets\Voltage Regulators\Diodes Inc\AP2138-9.pdf", Int_Note="Created for Robert Samuel", Local_Supplier=Mouser, Local_Supplier_PN=621-AP2138N-1.8TRG1, Manufacturer_PN=AP2138N-1.8TRG1, Offshore_Supplier=Digikey, Offshore_Supplier_PN=AP2138N-1.8TRG1DITR-ND, Pin_Count=3, Supplier=Azoteq, Type=SMT
U4: library part SN74LVC8T245PW-TSSOP-24, Manufacturer="Texas Instruments", Manufacturer_PN=SN74LVC8T245PWG4, ComponentLink1Description="Footprint Detail", ComponentLink2Description="Application Note", ComponentLink3Description="Layout Guidelines", Generated_By=GHM, Generated_Date=2012-03-13, HelpURL="\\Azoteq-files1\pcbcad\Datasheets\Tranceivers\Texas Instruments\SN74LVC8T245PWG4.pdf", Local_Supplier="RS Components", Local_Supplier_PN=663-2919, Pin_Count=24, Supplier=Azoteq, Type=SMT

## Via types
v1: diameter 0.7, hole 0.4, Top Layer to Bottom Layer, 364 vias

## Nets (pads, with @x,y where several pads share a name; then routed paths per layer and width w, separated by ;. In a path a pad name is that pad's centre, name@x,y a point inside that pad or via, vN(x,y) a via of type N, cw(c..) or ccw(c..) an arc to the next point about the centre after c; other vN are vias at no path point)
1V8: R7.2 S2.2 | length 40.9
  Top Layer w0.8: R7.2@29.7,17.75 29.7,19.55 28.484,20.766 28.484,29.734 32.65,33.9 32.65,53.375 33.75,54.475 S2.2@33.75,55.95
3V3: C7.2 P6.6 R1.2 R2.2 R4.2 R5.1 R6.1 R8.2 R9.2 S2.3 U1.6 U1.17 U4.23 U4.24 | length 152.9
  Top Layer w0.4: U4.23@25.35,44.425 26.716,44.425 26.95,44.659 26.95,45.075 ; U4.24@25.35,45.075 26.95,45.075 ; C7.2@25.7,46.75 26.716,46.75 26.95,46.516 26.95,45.075
  Top Layer w0.5: C7.2@25.7,46.75 25.7,47.957 25.993,48.25 29.85,48.25 ; v1(37.066,46.516) 37.066,45.493 37.359,45.2 U1.17@39.364,45.2 ; R1.2@46.7,53.75 48.75,53.75 49.154,53.346 U1.6@49.154,49.1 49.154,47.775 ; v1(48.773,47.75) v1@48.785,47.763 ; v1@49.515,47.763 v1(49.527,47.775)
  Top Layer w0.8: R5.1@19.95,50.05 R6.1@19.95,52.25 v1(27.75,52.25) ; R9.2@35.475,29.825 v1(35.475,30.775) ; v1@48.785,47.763 v1@49.515,47.763
  Top Layer w0.9: R4.2@21.1,2.75 R8.2@21.1,5.25
  Top Layer w1: P6.6@1.9,17.19 2.027,17.063 13.07,17.063 ; R2.2@14.9,14.1 14.9,6.85 16.5,5.25 R8.2@20.95,5.25 ; R2.2@14.9,14.2 14.072,14.2 13.486,14.786 13.486,18.062 16.114,20.69 24.973,20.69 25.85,21.567 v1(25.85,30.75) 29.85,34.75 v1(29.85,46.516) 29.85,48.25 29.85,51.45 29.05,52.25 v1(27.75,52.25)
  Bottom Layer w0.8: v1(25.85,30.75) v1@35.475,30.75 ; v1@29.75,46.516 v1(29.85,46.516) v1(37.066,46.516) 46.492,46.516 47.727,47.75 v1@49.527,47.75
  Bottom Layer w1: v1(27.75,52.25) 30.95,52.25 31.75,53.05 S2.3@31.75,55.95
  other v1: 28.65,52.3
ADC1: P6.1 U1.45 | length 48.4
  Top Layer w0.5: U1.45@42.154,18.8 42.159,18.805 42.159,24.862 v1(42.164,24.867)
  Bottom Layer w0.5: P6.1@1.9,29.89 3.46,29.89 8.483,24.867 v1(42.164,24.867)
ADC2: P6.2 U1.48 | length 49.8
  Top Layer w0.5: U1.48@45.154,18.8 v1(45.154,24)
  Bottom Layer w0.5: P6.2@1.9,27.35 1.95,27.3 3.35,27.3 6.65,24 v1(45.154,24)
ADC_REF: ADC_REF.1 D2.1 R9.1 R10.2 U1.36 | length 9.2
  Top Layer w0.5: D2.1@33.325,28.075 33.4,28.15 35.4,28.15 R9.1@35.475,28.225 35.5,28.2 35.5,26.3 R10.2@35.525,26.275 R10.2@35.55,26.25 ; R10.2@35.525,26.225 39.339,26.225 U1.36@39.364,26.2
  Bottom Layer w0.5: v1(36.419,26.225) ADC_REF.1@37.581,26.225
BOOT0: D1.2 R5.2 U1.13 | length 28.1
  Top Layer w0.5: U1.13@42.164,49.125 v1(42.164,50.6)
  Top Layer w0.8: D1.2@16.6,50 v1(17.375,50) R5.2@18.15,50
  Bottom Layer w0.5: v1(17.375,50) 41.564,50 v1(42.164,50.6)
BOOT_IO: D1.1 R6.2 S1.2 U1.28 | length 48
  Top Layer w0.5: v1(14.9,36.6) 14.9,55.65 15.1,55.85 S1.2@15.15,55.85 ; v1(37.9,34.2) U1.28@39.364,34.2
  Top Layer w0.8: 15.15,52.25 R6.2@18.35,52.25
  Bottom Layer w0.5: v1(14.9,36.6) 29.06,36.6 31.46,34.2 v1(37.9,34.2)
CASE_GND: J1.S1 J1.S2 J1.S3 J1.S4 R11.1 | length 12.7
  Top Layer w1: J1.S1@37.784,1.591 J1.S3@37.784,5.591 ; J1.S4@49.024,1.591 J1.S2@49.024,5.591 R11.1@49.024,10.25
CC1: J1.A5 R14.1 | length 4.6
  Top Layer w0.3: R14.1@40.9,10.45 41.2,10.15 41.774,10.15 42.154,9.77 J1.A5@42.154,6.741
CC2: J1.B5 R15.1 | length 4.9
  Top Layer w0.3: J1.B5@45.154,6.741 45.154,7.904 45.7,8.45 45.7,9.974 45.876,10.15 46.6,10.15 R15.1@46.9,10.45
CH1_IN: CH1.1 U1.44 U4.21 | length 59.5
  Top Layer w0.4: v1@24.1,43.125 U4.21@25.35,43.125
  Top Layer w0.5: U1.44@41.154,18.8 v1(41.154,20) ; v1(48.3,21.05) v1@48.3,44.075
  Bottom Layer w0.4: v1(24.1,43.1) 24.134,43.1 25.134,44.1 v1(48.3,44.1)
  Bottom Layer w0.5: v1(41.154,20) 41.192,20.038 41.192,20.757 41.485,21.05 v1(48.3,21.05) ; CH1.1@46.9,33.95 v1(48.3,33.95)
CH1_OUT: P5.1 U4.3 | length 21.6
  Top Layer w0.4: v1(17.35,43.8) 17.362,43.788 19.438,43.788 U4.3@19.45,43.775
  Top Layer w0.5: 2.9,38.02 12.32,38.02 13.6,39.3 v1(13.6,43.8)
  Bottom Layer w0.5: v1(13.6,43.8) v1(17.35,43.8)
CH2_IN: CH2.1 U1.47 U4.20 | length 45.1
  Top Layer w0.4: U4.20@25.35,42.475 v1@26.6,42.475
  Top Layer w0.5: U1.47@44.154,18.8 v1@44.154,30.616 ; v1@44.154,30.75 v1(44.154,30.95) v1@44.154,42.35 ; v1@44.154,30.816 v1@44.2,30.861
  Bottom Layer w0.4: v1(26.55,42.45) v1@44.129,42.45
  Bottom Layer w0.5: v1(44.154,30.95) CH2.1@46.9,30.95
  other v1: 44.15,42.35
CH2_OUT: P5.2 U4.4 | length 26.8
  Top Layer w0.4: U4.4@19.45,43.125 v1@20.7,43.125
  Bottom Layer w0.4: 3.47,37.45 21.15,37.45 22.05,38.35 22.05,42.569 21.557,43.062 v1@20.688,43.062
  Bottom Layer w0.5: 2.9,38.02 3.47,37.45 ; v1(20.65,43.1) v1@20.688,43.062
CH3_IN: CH3.1 U1.46 U4.19 | length 46.8
  Top Layer w0.4: v1(24.1,41.825) U4.19@25.35,41.825
  Top Layer w0.5: U1.46@43.154,18.8 43.154,20 v1(43.154,27.95) v1(43.154,37.65)
  Bottom Layer w0.4: v1(24.1,41.825) 25.116,41.825 25.35,41.591 25.35,37.884 25.584,37.65 27.728,37.65 v1(43.154,37.65)
  Bottom Layer w0.5: v1(43.154,27.95) CH3.1@46.9,27.95
CH3_OUT: P5.3 U4.5 | length 18.3
  Top Layer w0.4: v1(17.35,42.65) 17.391,42.691 18.15,42.691 18.341,42.5 19.425,42.5 U4.5@19.45,42.475
  Top Layer w0.5: 2.9,40.56 10.16,40.56 10.55,40.95 v1(10.55,41.65)
  Bottom Layer w0.4: v1(10.55,41.65) 10.607,41.707 10.607,42.416 10.842,42.65 v1(17.35,42.65)
CH4_IN: CH4.1 U1.20 U4.18 | length 40.3
  Top Layer w0.4: U4.18@25.35,41.175 v1@26.6,41.175 ; v1(37.725,41.15) 37.725,41.791 37.959,42.025 39.189,42.025 U1.20@39.364,42.2
  Top Layer w0.5: v1(45.154,25) v1(45.154,41.15)
  Bottom Layer w0.4: v1(26.55,41.15) v1(45.154,41.15)
  Bottom Layer w0.5: v1@45.154,25.092 45.154,25.054 45.258,24.95 CH4.1@46.9,24.95
CH4_OUT: P5.4 U4.6 | length 24.6
  Top Layer w0.4: U4.6@19.45,41.825 v1@20.7,41.825
  Bottom Layer w0.4: 2.9,40.56 3.55,39.91 6.265,39.91 7.975,38.2 20.95,38.2 21.4,38.65 21.4,41.508 21.166,41.743 20.707,41.743 v1(20.65,41.8)
CH5_IN: CH5.1 U1.9 U4.17 | length 53.5
  Top Layer w0.4: v1(24.1,40.525) U4.17@25.35,40.525
  Top Layer w0.5: U1.9@46.154,49.1 46.154,48.05 47.454,46.75 49.55,46.75 v1(51.45,44.85) v1@51.45,33.989
  Bottom Layer w0.4: v1(24.1,40.525) 24.043,40.582 23.584,40.582 23.35,40.817 23.35,43.5 24.7,44.85 v1(51.45,44.85)
  Bottom Layer w0.5: v1(51.45,33.9) 51.475,33.925 52.875,33.925 CH5.1@52.9,33.95
CH5_OUT: P5.5 U4.7 | length 18
  Top Layer w0.4: v1(17.35,41.65) 17.407,41.593 18.032,41.593 18.425,41.2 19.425,41.2 U4.7@19.45,41.175
  Top Layer w0.5: 2.9,43.1 11.357,43.1 11.65,42.807 v1(11.65,41.65)
  Bottom Layer w0.4: v1@11.718,41.65 v1(17.35,41.65)
CH6_IN: CH6.1 U1.12 U4.16 | length 50.7
  Top Layer w0.4: U4.16@25.35,39.875 v1@26.6,39.875
  Top Layer w0.5: U1.12@43.154,49.1 43.245,49.009 43.245,47.98 43.463,47.763 45.376,47.763 47.142,45.996 49.233,45.996 50.65,44.579 v1(50.65,39.875) 50.65,31.75 v1(51.45,30.95)
  Bottom Layer w0.4: v1(26.55,39.875) v1(50.65,39.875)
  Bottom Layer w0.5: v1(51.45,30.95) CH6.1@52.9,30.95
CH6_OUT: P5.6 U4.8 | length 22.1
  Top Layer w0.4: U4.8@19.45,40.525 v1@20.7,40.525
  Bottom Layer w0.4: 2.9,43.1 3.55,42.45 5.888,42.45 9.488,38.85 20.15,38.85 20.65,39.35 v1(20.65,40.525)
CH7_IN: CH7.1 U1.1 U4.15 | length 61.5
  Top Layer w0.4: v1(24.1,39.225) U4.15@25.35,39.225
  Top Layer w0.5: v1(54.154,27.96) U1.1@54.154,49.1
  Bottom Layer w0.4: v1(24.1,39.225) 24.043,39.282 23.218,39.282 22.7,39.8 22.7,43.8 24.5,45.6 v1(54.154,45.6)
  Bottom Layer w0.5: CH7.1@52.9,27.95 52.905,27.955 54.149,27.955 v1(54.154,27.96)
CH7_OUT: P5.7 U4.9 | length 21
  Top Layer w0.4: v1(17.35,40.65) 17.407,40.593 17.757,40.593 18.45,39.9 19.425,39.9 U4.9@19.45,39.875
  Top Layer w0.5: 2.9,45.64 11.11,45.64 12.509,44.241 v1(12.509,40.65)
  Bottom Layer w0.4: v1(12.509,40.65) v1(17.35,40.65)
CH8_IN: CH8.1 U1.19 U4.14 | length 55.3
  Top Layer w0.4: U4.14@25.35,38.575 v1(26.5,38.575)
  Top Layer w0.5: U1.19@39.364,43.2 v1(40.35,43.2) ; v1(49.8,43.2) 49.8,26.6 v1(51.45,24.95)
  Bottom Layer w0.4: v1(26.5,38.575) v1(49.8,38.575)
  Bottom Layer w0.5: v1(40.35,43.2) v1(49.8,43.2) ; v1(51.45,24.95) CH8.1@52.9,24.95
CH8_OUT: P5.8 U4.10 | length 19.2
  Top Layer w0.4: v1(17.4,39.65) 17.825,39.225 U4.10@19.45,39.225
  Bottom Layer w0.4: 2.9,45.64 3.55,44.99 5.748,44.99 11.088,39.65 v1(17.4,39.65)
DIR: U1.11 U4.2 | length 34.4
  Top Layer w0.35: v1(17.8,45.35) 17.8,44.659 18.034,44.425 U4.2@19.45,44.425
  Top Layer w0.5: v1(44.15,50.6) 44.152,50.598 44.152,49.102 U1.11@44.154,49.1
  Bottom Layer w0.5: v1(17.8,45.35) 17.8,48.659 18.268,49.127 42.677,49.127 v1(44.15,50.6)
GND: C1.1 C2.1 C3.1 C4.1 C5.1 C6.2 C7.1 D2.2 DS1.1 GND.1 J1.A1_B12 J1.B1_A12 P5.9 P5.10 P6.7 P6.8 R11.2 R13.1 R14.2 R15.2 S1.1 U1.5 U1.16 U1.40 U1.55 U1.56 U2.1 U3.1 U4.11 U4.12 U4.13 | length 30.4
  Top Layer w0.4: U4.12@18.917,37.95 18.942,37.925 U4.13@25.35,37.925 ; U4.11@18.917,38.55 18.942,38.575 U4.11@19.45,38.575
  Top Layer w0.5: 2.9,48.18 5.78,48.18 ; R13.1@29.725,26.475 R13.1@29.925,26.275 ; D2.2@33.175,30.125 D2.2@33.325,29.975 ; U1.40@39.364,22.2 39.489,22.075 40.21,22.075 40.465,21.82 40.465,21.438 v1(40.503,21.4) ; U1.5@50.154,49.1 v1(50.154,52)
  Top Layer w0.8: 19.6,9.569 U2.1@19.6,11.45 ; 20.069,9.1 21.05,9.1 21.1,9.05 C1.1@21.1,9 ; C3.1@46.7,52 v1(47.8,52)
  Bottom Layer w0.5: v1(47.8,52) v1(50.154,52)
  Bottom Layer w1: v1@39.1,7.85 39.7,7.25 47.05,7.25 v1@47.65,7.85
  other v1: 11.82,0.8 14.32,0.8 16.82,0.8 19.292,0.8 21.792,0.8 24.292,0.8 26.792,0.8 29.292,0.8 31.792,0.8 34.292,0.8 36.625,0.8 50.09,0.8 51.42,0.8 53.92,0.8 56.42,0.8 58.92,0.8 0.9,1 6.82,1 50.57,3.061 9.32,3.19 11.82,3.19 14.32,3.19 16.82,3.19 34.32,3.19 59,3.8 10.57,5.69 13.07,5.69 35.57,5.69 50.57,5.69 0.9,6.497 33.175,7.125 39.264,7.286 47.5,7.3 58.85,7.904 39.264,8.06 47.5,8.06 37.364,8.125 38.35,8.125 1.82,8.19 9.32,8.19 11.82,8.19 16.82,8.19 19.32,8.19 24.32,8.19 26.82,8.19 29.32,8.19 51.82,8.19 35.4,9.235 37.364,9.235 38.35,9.235 39.264,9.25 3.07,10.69 5.57,10.69 8.07,10.69 10.57,10.69 13.07,10.69 18.07,10.69 50.57,10.69 53.07,10.69 55.57,10.69 58.07,10.69 58.95,13.15 4.32,13.19 6.82,13.19 9.32,13.19 11.82,13.19 16.82,13.19 34.32,13.19 54.32,13.19 56.82,13.19 30.95,15 36.175,15 33.575,15.088 3.07,15.69 5.57,15.69 8.07,15.69 10.57,15.69 45.57,15.69 48.07,15.69 53.07,15.69 55.57,15.69 58.07,15.69 54.32,18.19 56.82,18.19 58.9,18.35 7.55,18.415 10.55,18.438 3.791,18.563 30.881,18.7 33.575,18.7 36.175,18.7 12.509,19.306 46.1,20 48.4,20.038 30.57,20.69 33.07,20.69 35.57,20.69 50.57,20.69 53.07,20.69 55.57,20.69 58.07,20.69 14.32,20.802 3.791,21.033 7.55,21.02 10.55,21.02 46.876,22.141 46.82,23.19 49.32,23.19 51.82,23.19 54.32,23.19 56.82,23.19 58.95,23.259 49.233,25.675 18.07,25.69 20.57,25.69 55.57,25.69 58.07,25.69 42.164,26.116 14.9,26.125 10.16,26.225 12.509,26.235 24.434,26.424 46.981,26.475 52.791,26.475 50.783,27.202 29.55,27.825 30.583,27.825 14.9,28.2 16.82,28.19 19.32,28.19 21.82,28.19 36.82,28.19 56.82,28.19 58.9,28.317 10.084,29 12.509,29 24.481,29.025 42.197,29.025 29.666,29.271 52.85,29.35 46.93,29.48 6.82,29.763 50.783,30 36.764,30.225 14.9,30.349 18.07,30.69 20.57,30.69 55.57,30.69 58.07,30.69 3.791,31.883 6.82,31.883 10.2,31.883 12.509,31.876 42.197,31.888 1.161,32 25.673,32.309 46.834,32.512 52.791,32.512 14.9,32.659 16.82,33.19 19.32,33.19 21.82,33.19 34.32,33.19 36.82,33.19 56.82,33.19 58.95,33.2 1.161,34.2 3.762,34.2 6.82,34.2 10.16,34.2 13.6,34.2 27.597,34.269 42.197,34.366 14.9,35.388 46.733,35.388 18.07,35.69 20.57,35.69 23.07,35.69 25.57,35.69 35.57,35.69 37.614,35.69 53.07,35.69 55.57,35.69 58.07,35.69 33.675,35.7 1.161,36.3 3.762,36.3 6.82,36.3 10.16,36.288 13.6,36.3 42.197,36.625 46.7,37.446 59,38.109 53.061,38.167 56.82,38.19 53.07,40.69 55.57,40.69 58.07,40.69 46.733,40.838 46.733,42.241 56.82,43.19 58.95,43.2 33.81,43.246 37.532,43.295 21.6,43.974 53.07,43.991 22.4,45.2 13.07,45.69 55.57,45.69 58.07,45.69 28.404,46.625 22.4,46.87 50.984,46.982 53.154,47.666 42.343,47.763 40.464,47.997 6.82,48.19 9.32,48.19 11.82,48.19 16.82,48.19 36.82,48.19 56.82,48.19 58.95,48.19 38.8,48.234 0.828,50.69 3.07,50.69 5.57,50.69 8.07,50.69 10.57,50.69 13.07,50.69 48.07,50.69 50.57,50.69 53.07,50.69 55.57,50.69 58.07,50.69 46.154,50.79 24.05,50.992 21.491,51.024 28.473,51.024 26.5,51.066 37.725,51.066 40.35,51.066 35.042,51.15 44.041,51.751 48.3,52.908 33.75,53.05 9.32,53.19 11.82,53.19 36.82,53.19 39.32,53.19 41.82,53.19 58.85,53.3 29.216,53.522 22.582,53.85 24.929,53.9 27.349,53.9 44.041,54.45 35.042,54.5 47.702,54.669 10.57,55.69 13.07,55.69 18.07,55.69 25.57,55.69 35.57,55.69 43.07,55.69 48.07,55.69 50.57,55.69 1.82,58.19 9.32,58.19 11.82,58.19 14.32,58.19 16.82,58.19 19.32,58.19 21.82,58.19 24.32,58.19 26.82,58.19 29.32,58.19 31.82,58.19 34.32,58.19 44.32,58.19 49.32,58.19 51.82,58.19 58.609,58.95
LED_B: DS2.1 U1.54 | length 32.1
  Top Layer w0.5: DS2.1@32.175,5.25 32.175,7.728 32.65,8.203 36.095,8.203 36.4,8.508 v1(36.4,13.55) ; v1(51.154,13.55) U1.54@51.154,18.8
  Bottom Layer w0.5: v1(36.4,13.55) v1(51.154,13.55)
Net1V8_1: 1V8.1 C5.2 R7.1 U3.2 | length 6.2
  Top Layer w0.5: U3.2@27.95,13.85 28.025,13.925 28.025,17.675 R7.1@28.1,17.75 v1(28.1,18.75)
  Bottom Layer w0.5: v1(28.1,18.75) 1V8.1@28.1,20
Net3V3_1: 3V3.1 C2.2 R2.1 U2.2 | length 19.2
  Top Layer w1: R2.1@14.9,15.995 14.9,17.164 15.486,17.75 16.9,17.75 ; C2.2@16.9,16 16.9,17.75 ; U2.2@21.9,11.45 U2.2@21.9,17.75 ; v1(21.9,19.174) U2.2@21.9,17.75 ; 16.9,17.75 U2.2@21.9,17.75
  Bottom Layer w1: v1(21.9,19.174) 3V3.1@21.9,20.45
NetD2_3: D2.3 R10.1 R13.2 | length 5.4
  Top Layer w0.5: D2.3@31.125,29.025 31.325,29.025 31.525,28.825 R13.2@31.525,26.275 R10.1@33.925,26.275
NetDS1_2: DS1.2 R4.1 | length 7.8
  Top Layer w0.5: R4.1@22.85,2.75 DS1.2@30.6,2.75
NetDS2_2: DS2.2 R8.1 | length 7.8
  Top Layer w0.5: R8.1@22.85,5.25 DS2.2@30.625,5.25
NetNRST_1: NRST.1 R3.1 | length 3
  Top Layer w0.5: R3.1@46.7,55.5 v1(46.7,56.85)
  Bottom Layer w0.5: v1(46.7,56.85) NRST.1@46.7,58.5
NOT_OE: U1.30 U4.22 | length 23.4
  Top Layer w0.4: U4.22@25.35,43.775 25.375,43.75 28.431,43.75 28.666,43.516 v1(28.666,35.7)
  Top Layer w0.5: v1(37.914,32.2) U1.30@39.364,32.2
  Bottom Layer w0.5: v1(28.666,35.7) 32.166,32.2 v1(37.914,32.2)
NRST: C3.2 R1.1 R3.2 U1.10 | length 6.4
  Top Layer w0.5: R3.2@45.1,55.5 45.127,55.473 45.127,49.127 U1.10@45.154,49.1
PWM1: P6.3 U1.31 | length 48.1
  Top Layer w0.5: U1.31@39.364,31.2 39.489,31.075 40.05,31.075 40.464,30.661 v1(40.464,23.15)
  Bottom Layer w0.5: P6.3@1.9,24.81 3.685,24.81 5.345,23.15 v1(40.464,23.15)
PWM2: P6.4 U1.14 | length 66.2
  Top Layer w0.5: U1.14@41.264,49.05 41.264,22.286 v1(41.3,22.25)
  Bottom Layer w0.5: P6.4@1.9,22.27 1.91,22.26 41.29,22.26 v1(41.3,22.25)
USBDN: R16.1 U1.38 | length 19.6
  Top Layer w0.381: U1.38@39.364,24.2 39.214,24.05 37.886,24.05 37.203,23.367 37.203,15.764 37.767,15.2 42.669,15.2 43.55,14.319 43.55,12.55 43.05,12.05 R16.1@43,12.05
USBDN_IN: J1.A7 J1.B7 R16.2 | length 7.9
  Top Layer w0.3: J1.B7@42.654,6.741 42.654,9.4 ; R16.2@42.9,10.45 42.654,10.204 42.654,9.4 ; J1.A7@43.654,6.741 43.654,8.06 44.054,8.46 44.054,9.04 43.594,9.5 42.754,9.5 42.654,9.4
USBDP: R17.2 U1.39 | length 18.6
  Top Layer w0.381: U1.39@39.364,23.2 39.214,23.35 38.007,23.35 37.784,23.127 37.784,16.004 38.007,15.781 42.91,15.781 44.2,14.491 44.2,12.61 44.49,12.319 44.49,12.31 44.75,12.05 R17.2@44.8,12.05
USBDP_IN: J1.A6 J1.B6 R17.1 | length 7.7
  Top Layer w0.3: J1.A6@43.154,6.741 43.154,8.442 43.354,8.642 v1(43.354,8.75) ; J1.B6@44.154,6.741 44.154,7.853 44.9,8.599 v1(44.9,8.75) R17.1@44.9,10.45
  Bottom Layer w0.3: v1(43.354,8.75) v1(44.9,8.75)
V_BUS: J1.A4_B9 J1.B4_A9 R12.2 | length 11.5
  Bottom Layer w1: 39.264,11 45.814,11 46.4,10.414 v1(46.4,9.2) v1(46.4,8.45) ; v1(41,8.45) v1(41,9.2) 41,10.65
  other v1: 39.1,10.59 39.1,11.45
V_USB: C1.2 C4.2 R12.1 S2.4 U2.3 U3.3 VUSB.1 | length 63
  Top Layer w0.8: C1.2@22.7,9 23.731,9 24.2,9.469 U2.3@24.2,11.45
  Top Layer w1: U2.3@24.4,11 26.354,11 ; S2.4@29.75,55.95 29.781,55.919 29.781,54.669 31.25,53.2 31.25,34.25 27.2,30.2 27.2,20.882 26.354,20.036 26.354,11 ; R12.1@34.9,11 v1(33.65,11) 31.65,11 26.354,11
  Bottom Layer w1: v1(33.65,11) VUSB.1@34.9,11
VREF: C6.1 P6.5 S2.1 U4.1 VREF.1 | length 71.2
  Top Layer w0.5: P6.5@1.9,19.73 11.43,19.73 15.94,24.24 15.94,46.39 16.3,46.75 C6.1@19.1,46.75 ; U4.1@19.1,45.146 C6.1@19.1,46.75 ; v1(19.15,47.775) 19.125,47.75 19.125,46.775 C6.1@19.1,46.75 ; v1(33.95,47.775) 33.95,51.95 37.75,55.75 S2.1@37.75,55.95
  Bottom Layer w0.5: v1(19.15,47.775) v1(33.95,47.775) ; S2.1@37.75,55.95 VREF.1@37.75,58.629
pads on no net: J1.A8 J1.B8 P1.1 P2.1 P3.1 P4.1 S2.HM U1.2 U1.3 U1.4 U1.7 U1.8 U1.15 U1.18 U1.21 U1.22 U1.23 U1.24 U1.25 U1.26 U1.27 U1.29 U1.32 U1.33 U1.34 U1.35 U1.37 U1.41 U1.42 U1.43 U1.49 U1.50 U1.51 U1.52 U1.53
copper on no net: | length 1079.6
  Top Layer w0.2: -13.626,82.24 70.05,82.24 ; -13.626,85.99 70.05,85.99 ; -13.626,93.49 70.05,93.49 ; -13.376,89.74 70.05,89.74
  Top Layer w0.5: -13.626,78.3 -13.626,97.3 70.05,97.3 70.05,78.3 -13.626,78.3
  Bottom Layer w0.2: -13.548,82.259 70.129,82.259 ; -13.548,86.009 70.129,86.009 ; -13.548,93.509 70.129,93.509 ; -13.298,89.759 70.129,89.759
  Bottom Layer w0.5: -13.548,78.319 -13.548,97.319 70.129,97.319 70.129,78.319 -13.548,78.319

## Polygon pours and split planes (outlines as drawn)
GND on Bottom Layer "GND_L02_P001" (solid, remove dead copper, pour order 1): 0,0.2 0,60.2 60,60.2 60,0.2
GND on Top Layer "GND" (solid, remove dead copper, pour order 0): 0,60.2 60,60.2 60,0.2 0,0.2
no net on Drill Drawing "BOT_20-D3" (hatched 45Degree grid 0.66 track 0.2, remove dead copper): 38.182,-0.2 48.55,-0.2 48.55,-1.45 38.182,-1.45

## Keep-outs
Keep-Out Layer:
  circle w0.254: c27.65,55.95 r0.828
  circle w0.254: c39.85,55.95 r0.756
  lines w0.3: 0,60 0,-0.009 38.784,-0.009 ; 48.024,-0.009 59.8,-0.009
  lines w0.4: 0,60 59.8,60 59.8,-0.009 ; 0,60.4 ccw(c0,60.2) -0.2,60.2 cw(c0,60.2) 0,60.4 ; 0,60.4 60,60.4 ; 60,60.4 cw(c60,60.2) 60.2,60.2 ; 60,60.4 cw(c60,60.2) 60.2,60.2 ; 60.2,0.2 cw(c60,0.2) 60,0 ccw(c60,0.2) 60.2,0.2 ; 60.2,0.2 60.2,60.2

## Other copper
Top Layer:
  rectangle net GND: 18.346,10.84 19.32,11.983
  rectangle net GND: 18.406,9 19.6,10.1
  rectangle net GND: 19.85,9.25 20.396,10.1
  rectangle net GND: 2.178,48.9 3.85,49.6
  rectangle net GND: 5,47.6 6.05,48.709
  rectangle net 3V3: 14.6,13.701 15.4,14.7
  rectangle net Net3V3_1: 18.55,13.05 25.25,19.751
  rectangle net V_BUS: 37.225,10.1 39.575,11.9
  rectangle net V_BUS: 40.705,6.2 41.3,9.55
  rectangle: 3.3,78.55 12.05,82.3
  rectangle: -4.7,86.05 12.05,89.8
  rectangle: 0.05,89.8 12.05,93.49
  rectangle: -3.7,93.3 12.05,97.3
  region net GND: 46.305,7.006 46.305,7.458 47.289,8.442 48.024,8.442 48.024,6.926 47.235,6.926 46.759,6.45 46.75,6.45
  region net GND: 40.503,7.006 40.503,7.631 39.692,8.442 38.784,8.442 38.784,6.926 39.573,6.926 40.049,6.45 40.058,6.45
  pour cut-out: 5.454,49.284 5.454,36.97 0,36.97 0,49.284
  pour cut-out: 37.017,0 37.017,6.926 49.5,6.926 49.5,0
  pour cut-out: 18.6,9.5 24.5,9.5 24.5,12.45 18.6,12.45
  region net V_BUS: 45.505,6.3 45.505,7.746 46.05,8.291 46.05,9.6 46.75,9.6 46.75,8.203 46.1,7.553 46.1,6.3
  text ".Company_Name" at 12.8,94.55 h3
  text "OWNER:" at -13.7,93.55 h2.7
  text ".Project_Title" at 12.8,90.55 h3
  text "PCB TITLE:" at -13.7,89.8 h2.7
  text ".Project_Document_Number" at 12.8,87.05 h3
  text ".Rev" at 59.05,87.05 h2.5
  text "PCB #:" at -13.45,86.05 h2.7
  text "REV:" at 51.3,86.009 h2.7
  text ".Plot_File_Name" at 12.8,83.3 h3
  text "GERBER FILENAME:" at -13.7,82.255 h2.7
  text "Top (Component Side)" at 12.8,79.55 h3
  text "LAYER NAME:" at -13.7,78.55 h2.7
Bottom Layer:
  rectangle net GND: 2.178,48.55 4,49.75
  rectangle net GND: 5,47.775 6.037,48.668
  rectangle net V_BUS: 38.7,10.1 39.575,11.9
  rectangle: 3.379,78.569 12.129,82.319
  rectangle: -4.621,86.069 12.129,89.819
  rectangle: 0.129,89.819 12.129,93.509
  rectangle: -3.621,93.319 12.129,97.319
  pour cut-out: 5.454,49.284 5.454,36.97 0,36.97 0,49.284
  pour cut-out: 37.017,0 37.017,6.926 49.755,6.926 49.755,0
  text ".Company_Name" at 12.879,94.569 h3
  text "OWNER:" at -13.621,93.569 h2.7
  text ".Project_Title" at 12.879,90.569 h3
  text "PCB TITLE:" at -13.621,89.819 h2.7
  text ".Project_Document_Number" at 12.879,87.069 h3
  text ".Rev" at 59.129,87.069 h2.5
  text "PCB #:" at -13.371,86.069 h2.7
  text "REV:" at 51.379,86.028 h2.7
  text ".Plot_File_Name" at 12.879,83.319 h3
  text "GERBER FILENAME:" at -13.621,82.275 h2.7
  text "Bottom (Solder Side)" at 12.879,79.569 h3
  text "LAYER NAME:" at -13.621,78.569 h2.7

## Silkscreen, mask and mechanical layers (free items; w line width, h text height)
Top Overlay:
  rectangle: -3.7,93.3 12.05,97.3
  rectangle: 0.05,89.8 12.05,93.49
  rectangle: -4.7,86.05 12.05,89.8
  rectangle: 3.3,78.55 12.05,82.3
  lines w0.2: -13.626,82.24 70.05,82.24 ; -13.626,85.99 70.05,85.99 ; -13.626,93.49 70.05,93.49 ; -13.376,89.74 70.05,89.74
  lines w0.5: -13.626,78.3 70.05,78.3 70.05,97.3 -13.626,97.3 -13.626,78.3
  text ".Company_Name" at 12.8,94.55 h3
  text "OWNER:" at -13.7,93.55 h2.7
  text ".Project_Title" at 12.8,90.55 h3
  text "PCB TITLE:" at -13.7,89.8 h2.7
  text ".Project_Document_Number" at 12.8,87.05 h3
  text ".Rev" at 59.05,87.05 h2.5
  text "PCB #:" at -13.45,86.05 h2.7
  text "REV:" at 51.3,86.009 h2.7
  text ".Plot_File_Name" at 12.8,83.3 h3
  text "GERBER FILENAME:" at -13.7,82.255 h2.7
  text "Top Overlay" at 12.8,79.55 h3
  text "LAYER NAME:" at -13.7,78.55 h2.7
  text "BOOT" at 8.818,54.786 h1.7
  text "VREF" at 30.993,51.636 h1.7
  text "GND" at 6.385,47.656 h1.7
  text "CH4" at 5.883,44.586 h1.7
  text "CH3" at 5.849,42.036 h1.7
  text "CH2" at 5.854,39.486 h1.7
  text "CH1" at 5.89,36.936 h1.7
  text "ADC1" at 3.205,28.936 h1.7
  text "ADC2" at 3.119,26.336 h1.7
  text "LOGIC" at 14.6,26.1 h3
  text "PWM1" at 3.199,23.803 h1.7
  text "ANALYSER" at 11.65,23.385 h3
  text "PWM2" at 3.701,21.723 h1.7
  text "VREF" at 3.158,18.706 h1.7
  text "3V3" at 3.225,16.143 h1.7
  text "GND" at 3.235,13.586 h1.7
  text "GND" at 3.235,11.036 h1.7
  text "DEBUG" at 23.678,4.227 h1.7
  text "3V3" at 23.678,1.693 h1.7
Bottom Overlay:
  drawing of 579 lines, arcs and shapes, not listed
  text ".Company_Name" at 12.8,94.519 h3
  text "OWNER:" at -13.7,93.519 h2.7
  text ".Project_Title" at 12.8,90.519 h3
  text "PCB TITLE:" at -13.7,89.769 h2.7
  text ".Project_Document_Number" at 12.8,87.019 h3
  text ".Rev" at 59.05,87.019 h2.5
  text "PCB #:" at -13.45,86.019 h2.7
  text "REV:" at 51.3,85.978 h2.7
  text ".Plot_File_Name" at 12.8,83.269 h3